# EAGLE board racing_unit (EAGLE 7.2.0)
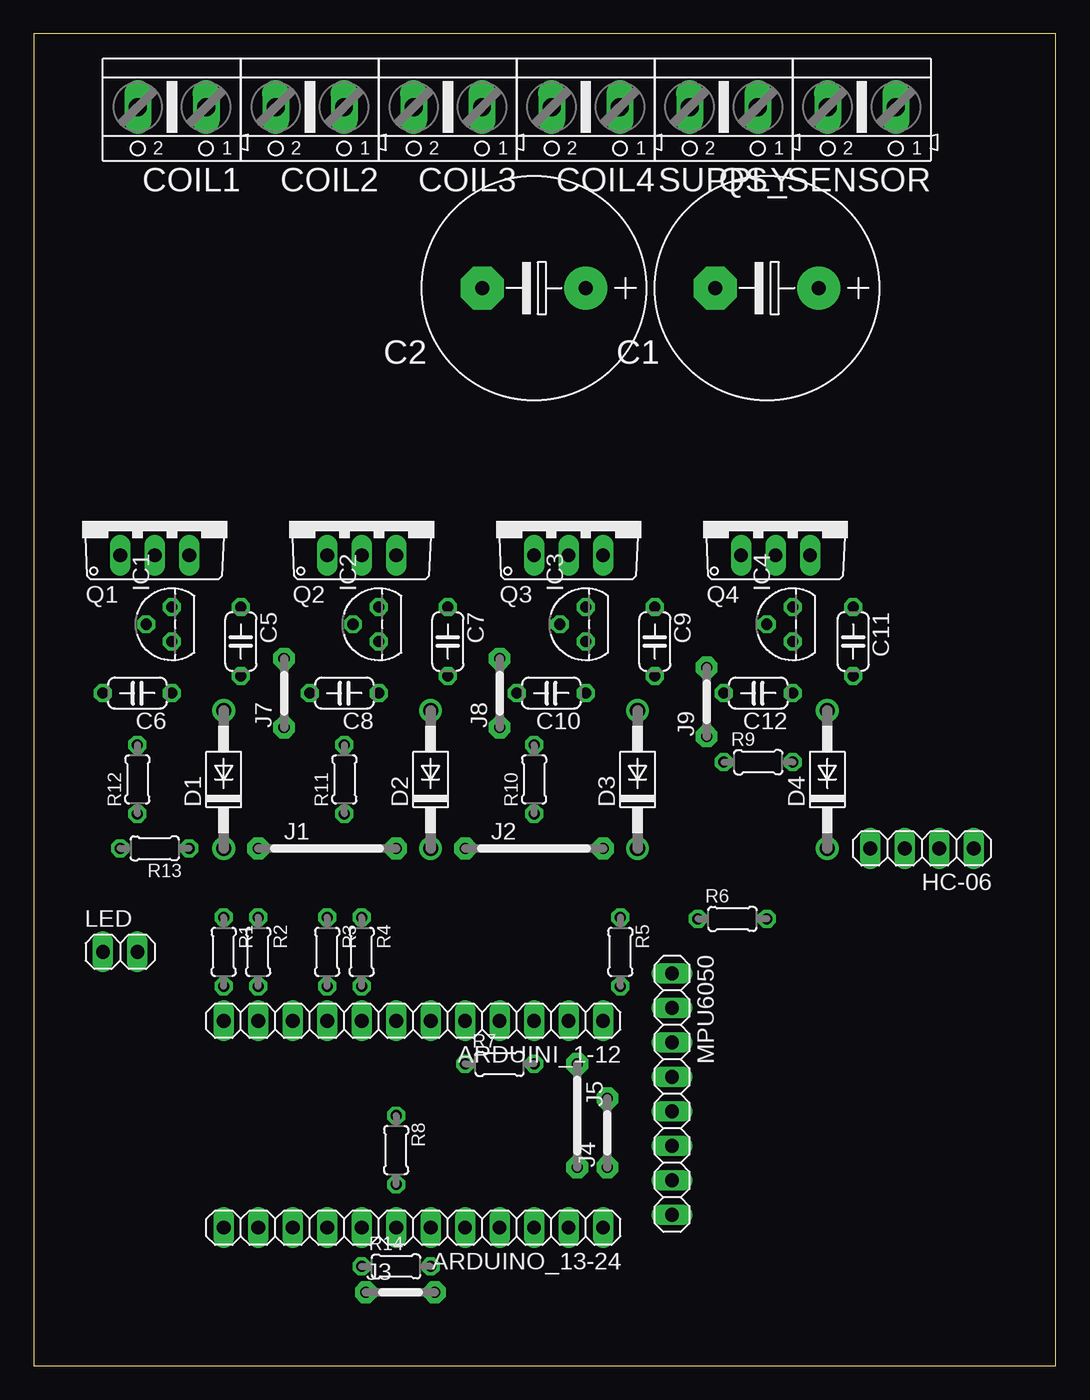
[diagram p0: board, top side]
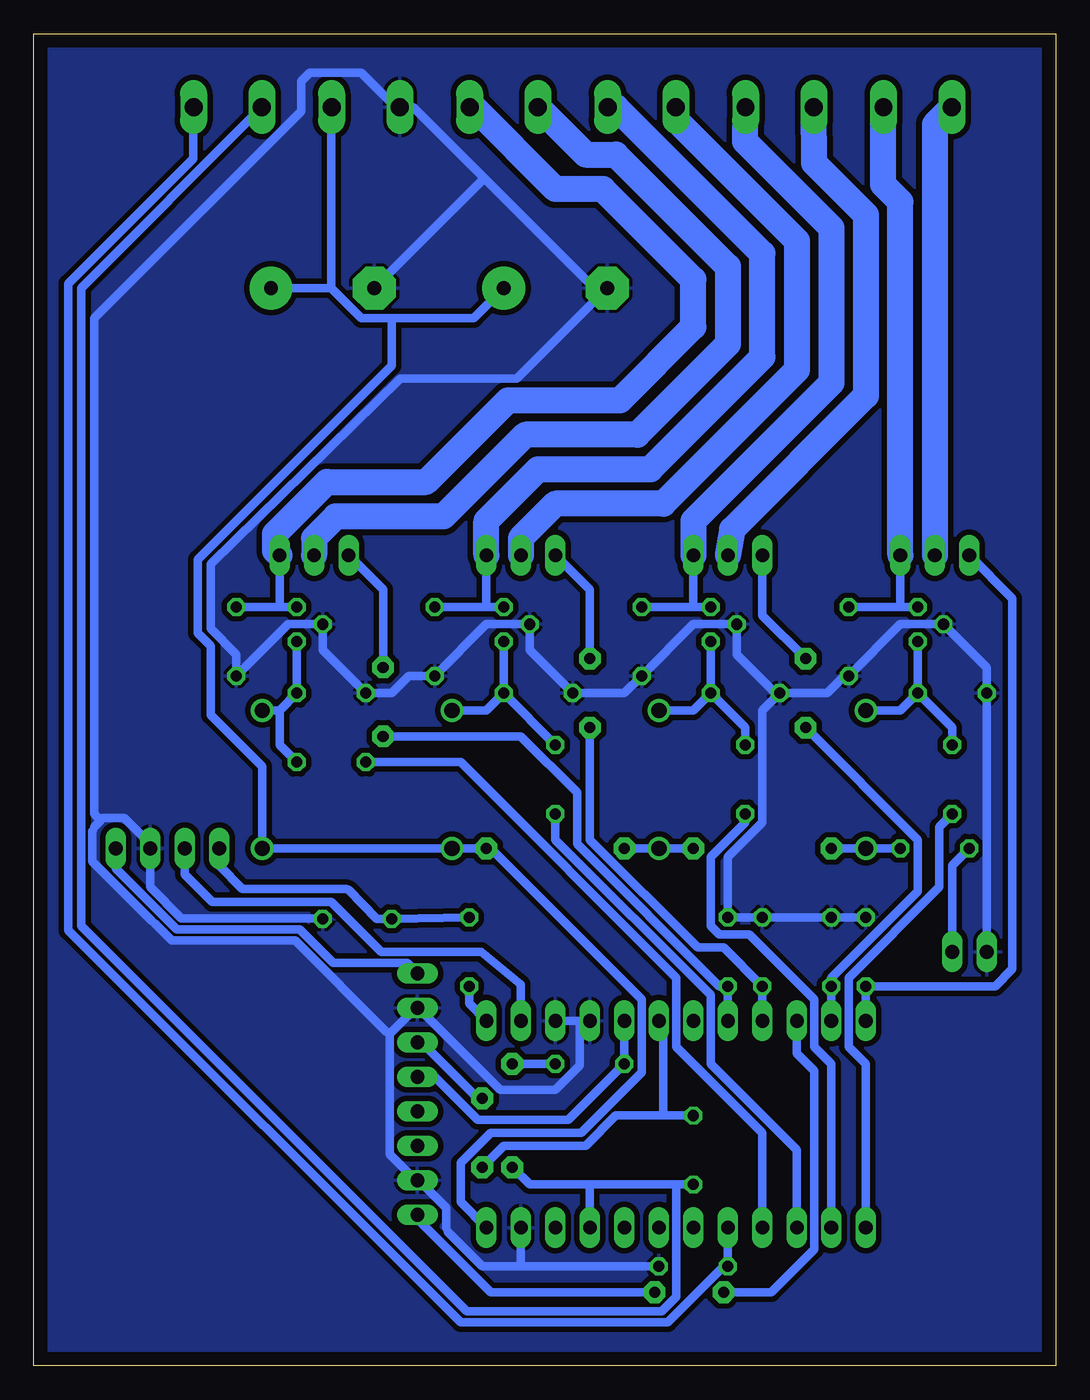
[diagram p1: board, bottom side, seen from below]

Size 75.23 x 98.1 mm. Coordinates in mm from the lower left corner, seen from the top.
Outline: 0,0 75.23,0 75.23,98.1 0,98.1 0,0
Copper layers (1*16): Top 0.035mm / dielectric 1.5mm / Bottom 0.035mm
Design rules "default": minimum track width 10mil, minimum drill 24mil, track to track 8mil, track to pad 8mil, pad to pad 8mil, via to via 8mil, smd to smd 8mil, copper to edge 40mil, drill to drill 8mil, minimum pad ring 10mil, minimum via ring 8mil, stop-mask expansion 4mil, vias tented up to drill 0mil, thermal gap 10mil

## Footprints (pad centres in the part's own frame; a part is rotated, then mirrored left to right if it is on the bottom)
1X12 = drill 1.016 long: 1 -13.97,0; 2 -11.43,0; 3 -8.89,0; 4 -6.35,0; 5 -3.81,0; 6 -1.27,0; 7 1.27,0; 8 3.81,0; 9 6.35,0; 10 8.89,0; 11 11.43,0; 12 13.97,0
E7,5-16 = drill 1.016 pad 3.15: + -3.81,0 | drill 1.016 pad 3.15 octagon: - 3.81,0
C050-024X044 = drill 0.813 octagon: 1 -2.54,0; 2 2.54,0
AK500/2 = drill 1.321 long: 1 -2.515,0; 2 2.515,0
DO41-10 = drill 1.118: A 5.08,0; C -5.08,0
1X04 = drill 1.016 long: 1 -3.81,0; 2 -1.27,0; 3 1.27,0; 4 3.81,0
TO92 = drill 0.813 octagon: 1 -1.27,0; 2 0,1.905; 3 1.27,0
10 = drill 0.813 pad 1.6 octagon: 1 -5.08,0; 2 5.08,0
05 = drill 0.813 pad 1.6 octagon: 1 -2.54,0; 2 2.54,0
07 = drill 0.813 pad 1.6 octagon: 1 -3.81,0; 2 3.81,0
1X02 = drill 1.016 long: 1 -1.27,0; 2 1.27,0
1X08 = drill 1.016 long: 1 -8.89,0; 2 -6.35,0; 3 -3.81,0; 4 -1.27,0; 5 1.27,0; 6 3.81,0; 7 6.35,0; 8 8.89,0
TO220AV = drill 1.016 long: B -2.54,-2.54; C 0,-2.54; E 2.54,-2.54
0204/5 = drill 0.813 octagon: 1 -2.54,0; 2 2.54,0

## Placement (x,y rotation side)
ARDUINI_1-12  [1X12]  27.94,25.4 180 top
ARDUINO_13-24  [1X12]  27.94,10.16 180 top
C1  4700uF/25V  [E7,5-16]  53.98,79.38 180 top
C2  4700uF/25V  [E7,5-16]  36.83,79.38 180 top
C5  330n  [C050-024X044]  15.24,53.34 270 top
C6  10n  [C050-024X044]  7.62,49.53 180 top
C7  330n  [C050-024X044]  30.48,53.34 270 top
C8  10n  [C050-024X044]  22.86,49.53 180 top
C9  330n  [C050-024X044]  45.72,53.34 270 top
C10  10n  [C050-024X044]  38.1,49.53 180 top
C11  330n  [C050-024X044]  60.33,53.34 270 top
C12  10n  [C050-024X044]  53.34,49.53 180 top
COIL1  [AK500/2]  10.16,92.71 180 top
COIL2  [AK500/2]  20.32,92.71 180 top
COIL3  [AK500/2]  30.48,92.71 180 top
COIL4  [AK500/2]  40.64,92.71 180 top
D1  1N4937  [DO41-10]  13.97,43.18 90 top
D2  1N4937  [DO41-10]  29.21,43.18 90 top
D3  1N4937  [DO41-10]  44.45,43.18 90 top
D4  1N4937  [DO41-10]  58.42,43.18 90 top
HC-06  [1X04]  65.41,38.1 180 top
IC1  78L05Z  [TO92]  10.16,54.61 90 top
IC2  78L05Z  [TO92]  25.4,54.61 90 top
IC3  78L05Z  [TO92]  40.64,54.61 90 top
IC4  78L05Z  [TO92]  55.88,54.61 90 top
J1  J10MM  [10]  21.59,38.1 0 top
J2  J10MM  [10]  36.83,38.1 0 top
J3  J5MM  [05]  26.99,5.4 0 top
J4  J5MM  [05]  42.23,17.14 90 top
J5  J7MM  [07]  40.01,18.41 270 top
J7  J5MM  [05]  18.41,49.53 90 top
J8  J5MM  [05]  34.29,49.53 90 top
J9  J5MM  [05]  49.53,48.9 90 top
LED  [1X02]  6.35,30.48 0 top
MPU6050  [1X08]  46.99,20 270 top
Q1  BDX54C  [TO220AV]  8.89,62.23 0 top
Q2  BDX54C  [TO220AV]  24.13,62.23 0 top
Q3  BDX54C  [TO220AV]  39.37,62.23 0 top
Q4  BDX54C  [TO220AV]  54.61,62.23 0 top
QS_SENSOR  [AK500/2]  60.96,92.71 180 top
R1  1k  [0204/5]  13.97,30.48 270 top
R2  1k  [0204/5]  16.51,30.48 270 top
R3  1k  [0204/5]  21.59,30.48 270 top
R4  1k  [0204/5]  24.13,30.48 270 top
R5  1k  [0204/5]  43.18,30.48 270 top
R6  2k2  [0204/5]  51.44,32.91 0 top
R7  1k  [0204/5]  34.29,22.23 0 top
R8  1k  [0204/5]  26.67,15.88 270 top
R9  1k  [0204/5]  53.34,44.45 0 top
R10  1k  [0204/5]  36.83,43.18 90 top
R11  1k  [0204/5]  22.86,43.18 90 top
R12  1k  [0204/5]  7.62,43.18 90 top
R13  150R  [0204/5]  8.89,38.1 180 top
R14  330R  [0204/5]  26.67,7.3 0 top
SUPPLY  [AK500/2]  50.8,92.71 180 top

## Library data of the parts
ARDUINI_1-12 ARDUINO_13-24 HC-06 LED MPU6050 = pinhead
C1 C2 C5-C12 = rcl
COIL1-COIL4 QS_SENSOR SUPPLY = con-ptr500; OC_FARNELL: unknown; OC_NEWARK: unknown
D1-D4 = diode
IC1-IC4 = linear
J1-J5 J7-J9 = jumper
Q1-Q4 = transistor-power
R1-R14 = resistor

## Nets
GND: ARDUINI_1-12.3 ARDUINI_1-12.4 ARDUINO_13-24.2 C1.- C2.- C5.2 C6.2 C7.2 C8.2 C9.2 C10.2 C11.2 C12.2 HC-06.2 IC1.2 IC2.2 IC3.2 IC4.2 LED.1 MPU6050.2 MPU6050.7 R1.1 R2.1 R3.1 R4.1 R6.2 R14.2 SUPPLY.2
N$1: C5.1 COIL1.1 IC1.3 Q1.E
N$2: C7.1 COIL2.1 IC2.3 Q2.E
N$3: C9.1 COIL3.1 IC3.3 Q3.E
N$4: C11.1 COIL4.1 IC4.3 Q4.E
N$6: ARDUINI_1-12.2 HC-06.3
N$7: D1.C J1.1 R13.1
N$8: D2.C J1.2 J2.1
N$9: COIL4.2 Q4.C
N$10: COIL3.2 Q3.C
N$11: COIL2.2 Q2.C
N$12: COIL1.2 Q1.C
N$13: LED.2 R13.2
N$14: C6.1 D1.A IC1.1 R12.2
N$15: C8.1 D2.A IC2.1 R11.2
N$16: ARDUINO_13-24.8 QS_SENSOR.1 R14.1
N$17: C12.1 D4.A IC4.1 R9.2
N$18: ARDUINO_13-24.4 J5.2 QS_SENSOR.2 R8.2
N$19: ARDUINO_13-24.1 C1.+ C2.+ D3.C D4.C J2.2 SUPPLY.1
N$20: ARDUINI_1-12.10 J3.1
N$21: C10.1 D3.A IC3.1 R10.2
N$22: ARDUINI_1-12.1 R5.2
N$23: ARDUINO_13-24.12 R12.1
N$24: ARDUINO_13-24.11 R11.1
N$25: ARDUINO_13-24.10 R10.1
N$26: ARDUINO_13-24.9 R9.1
N$27: ARDUINI_1-12.6 J4.1 R8.1
N$28: ARDUINI_1-12.12 Q1.B R1.2
N$29: J3.2 MPU6050.8
N$30: J7.2 Q2.B
N$31: ARDUINI_1-12.5 MPU6050.4 R7.1
N$32: HC-06.4 R5.1 R6.1
N$33: J4.2 MPU6050.3
N$34: HC-06.1 MPU6050.1
N$35: ARDUINI_1-12.11 J7.1 R2.2
N$36: J5.1 R7.2
N$37: J8.2 Q3.B
N$38: ARDUINI_1-12.9 J8.1 R3.2
N$40: J9.2 Q4.B
N$41: ARDUINI_1-12.8 J9.1 R4.2

## Tracks (layer width: path | path; a pad name or v marks a point on that pad's centre or on a via)
GND
  Bottom 0.61: R1.1 R2.1 R3.1 R4.1 24.13,37.47 21.59,40.01 21.59,48.26 C8.2 | LED.1 C6.2 5.08,51.44 IC1.2 11.43,54.61 C5.2 15.24,51.12 16.83,49.53 C8.2 | R14.2 39.37,7.3 | 39.37,7.3 42.23,7.3 44.77,9.84 44.88,10.13 44.88,11.61 46.91,13.64 MPU6050.7 47.27,13.79 49.02,15.54 49.02,24.43 | 42.07,87.47 33.97,79.38 C2.- 39.69,72.71 48.26,72.71 62.23,59.05 62.23,54.29 60.33,52.39 C11.2 56.52,54.61 IC4.2 53.98,52.7 C12.2 48.9,49.53 47.62,50.8 C9.2 41.91,54.61 IC3.2 38.73,52.7 C10.2 31.75,49.53 C7.2 26.67,54.61 IC2.2 23.5,52.39 20.64,49.53 C8.2 | 42.07,87.47 47.31,92.71 SUPPLY.2 48.58,92.71 51.12,95.25 54.93,95.25 55.56,94.61 55.56,92.39 70.8,77.15 70.8,40.64 70.33,40.16 | 42.07,87.47 C1.- | 70.33,40.16 70.17,40.32 68.58,40.32 66.67,38.42 HC-06.2 66.67,35.24 64.39,32.96 55.18,32.96 53.98,32.94 R6.2 | 70.33,40.16 70.8,39.69 70.92,39.4 70.94,39.37 70.94,37.13 66.57,32.77 66.34,32.59 65.08,31.32 56.01,31.32 49.28,24.59 49.02,24.43 | 39.37,7.3 ARDUINO_13-24.2 | 46.99,26.29 MPU6050.2 | ARDUINI_1-12.3 35.05,25.4 | 35.05,25.4 ARDUINI_1-12.4 | 35.05,25.4 35.05,22.1 36.83,20.32 40.89,20.32 46.74,26.16 MPU6050.2 | 49.02,24.43 47.27,26.19 MPU6050.2
  pour Bottom (isolate 0.406): 0,98.11 74.93,98.11 75.25,0 0,0
N$1
  Bottom 0.61: C5.1 11.43,55.88 | Q1.E 11.43,55.88 | IC1.3 11.43,55.88
  Bottom 1.93: Q1.E 11.43,85.72 12.7,87 COIL1.1
N$2
  Bottom 0.61: IC2.3 26.67,55.88 | 26.67,55.88 C7.1 | Q2.E 26.67,55.88
  Bottom 1.93: COIL2.1 22.86,90.17 16.51,83.82 16.51,72.39 26.67,62.23 Q2.E
N$3
  Bottom 0.61: IC3.3 41.91,55.88 | 41.91,55.88 C9.1 | Q3.E 41.91,55.88
  Bottom 1.93: Q3.E 41.91,62.23 38.1,66.04 29.84,66.04 21.59,74.3 21.59,81.92 32.38,92.71 COIL3.1
N$4
  Bottom 0.61: IC4.3 57.15,55.88 | 57.15,55.88 C11.1 | Q4.E 57.15,55.88
  Bottom 1.93: Q4.E 57.47,60.01 57.47,61.28 53.66,65.09 46.35,65.09 40.32,71.12 32.07,71.12 26.67,76.52 26.67,80.01 33.34,86.68 36.83,86.68 42.86,92.71 COIL4.1
N$6
  Bottom 0.61: ARDUINI_1-12.2 39.37,28.07 42.29,30.48 49.66,30.48 53.34,34.16 62.1,34.16 64.14,36.2 HC-06.3
N$7
  Bottom 0.61: J1.1 D1.C R13.1
N$8
  Bottom 0.61: J2.1 D2.C J1.2
N$9
  Bottom 1.93: Q4.C 54.61,60.96 53.02,62.55 45.09,62.55 39.05,68.58 30.8,68.58 24.13,75.25 24.13,80.96 32.38,89.22 34.61,89.22 38.1,92.71 COIL4.2
N$10
  Bottom 1.93: COIL3.2 27.94,91.76 19.05,82.87 19.05,73.34 28.89,63.5 36.83,63.5 39.37,60.96 Q3.C
N$11
  Bottom 1.93: Q2.C 23.81,61.59 13.97,71.44 13.97,84.77 17.78,88.58 COIL2.2
N$12
  Bottom 1.93: Q1.C 8.89,91.44 COIL1.2
N$13
  Bottom 0.61: LED.2 7.62,36.83 R13.2
N$14
  Bottom 0.61: IC1.1 C6.1 | C6.1 7.62,46.99 R12.2 | D1.A 11.43,48.26 C6.1
N$15
  Bottom 0.61: C8.1 IC2.1 | C8.1 22.86,46.99 R11.2 | D2.A 26.67,48.26 C8.1
N$16
  Bottom 0.61: ARDUINO_13-24.8 24.13,7.62 | QS_SENSOR.1 63.5,88.9 72.71,79.69 72.71,32.07 43.81,3.17 28.57,3.17 24.13,7.62 | 24.13,7.62 R14.1
N$17
  Bottom 0.61: IC4.1 C12.1 57.15,48.26 | 57.15,48.26 D4.A | 57.15,48.26 57.15,45.72 R9.2
N$18
  Bottom 0.61: 27.94,13.34 R8.2 | QS_SENSOR.2 58.74,92.39 71.75,79.38 71.75,32.38 43.37,4 29.02,4 27.94,5.08 27.94,13.34 | J5.2 38.73,13.34 34.29,13.34 | 27.94,13.34 34.29,13.34 | 34.29,13.34 ARDUINO_13-24.4
N$19
  Bottom 0.61: 53.34,79.38 C1.+ | 53.34,79.38 51.12,77.15 48.9,77.15 | 48.9,77.15 42.86,77.15 C2.+ | 53.34,79.38 53.34,92.71 SUPPLY.1 | 48.9,77.15 48.9,73.66 63.18,59.37 63.18,53.98 62.23,53.02 62.23,47.94 58.42,44.13 D4.C D3.C J2.2 41.59,38.1 30.48,26.99 30.48,21.59 34.92,17.14 41.59,17.14 43.81,14.92 43.81,12.06 ARDUINO_13-24.1
N$20
  Bottom 0.61: ARDUINI_1-12.10 19.05,22.99 17.78,21.72 17.78,8.57 20.95,5.4 J3.1
N$21
  Bottom 0.61: IC3.1 C10.1 | R10.2 C10.1 | D3.A 41.91,48.26 C10.1
N$22
  Bottom 0.61: ARDUINI_1-12.1 43.18,26.67 R5.2
N$23
  Bottom 0.61: R12.1 8.57,39.69 8.57,35.24 15.24,28.57 15.24,23.5 13.97,22.23 ARDUINO_13-24.12
N$24
  Bottom 0.61: R11.1 22.86,40.01 25.4,37.47 25.4,32.38 24.77,31.75 22.54,31.75 17.78,26.99 17.78,23.5 16.51,22.23 ARDUINO_13-24.11
N$25
  Bottom 0.61: ARDUINO_13-24.10 19.05,15.88 25.4,22.23 25.4,27.3 36.83,38.73 R10.1
N$26
  Bottom 0.61: ARDUINO_13-24.9 21.59,17.14 27.94,23.5 27.94,28.57 43.81,44.45 R9.1
N$27
  Bottom 0.61: J4.1 40.64,16.19 34.61,16.19 32.38,18.41 28.89,18.41 | 28.89,18.41 R8.1 | 28.89,18.41 28.89,25.08 ARDUINI_1-12.6
N$28
  Bottom 0.61: ARDUINI_1-12.12 R1.2 4.45,27.94 3.17,29.21 3.17,56.52 Q1.B
N$29
  Bottom 0.61: MPU6050.8 46.99,10.79 41.59,5.4 J3.2
N$30
  Bottom 0.61: Q2.B 21.59,55.24 J7.2
N$31
  Bottom 0.61: ARDUINI_1-12.5 R7.1 35.88,18.1 42.55,18.1 45.72,21.27 MPU6050.4
N$32
  Bottom 0.61: HC-06.4 61.59,36.83 59.88,35.12 52.26,35.12 52.07,35.05 49.99,32.89 R6.1 R5.1
N$33
  Bottom 0.61: MPU6050.3 46.67,23.81 42.55,19.68 J4.2
N$34
  Bottom 0.61: HC-06.1 69.22,36.63 64.72,32.13 55.65,32.13 53.19,29.67 47.75,29.67 46.99,28.91 MPU6050.1
N$35
  Bottom 0.61: ARDUINI_1-12.11 R2.2 16.51,28.57 10.16,34.92 10.16,38.73 J7.1
N$36
  Bottom 0.61: R7.2 J5.1
N$37
  Bottom 0.61: J8.2 34.29,57.15 Q3.B
N$38
  Bottom 0.61: ARDUINI_1-12.9 R3.2 24.45,30.8 26.35,30.8 34.29,38.73 J8.1
N$40
  Bottom 0.61: Q4.B 49.53,57.15 J9.2
N$41
  Bottom 0.61: ARDUINI_1-12.8 R4.2 24.77,27.94 35.24,38.42 35.24,42.23 39.37,46.35 J9.1

## Text on the board
bRestrict: Racing Unit